# Altium PCB SDC_V3.0.PcbDoc (part 4 of 4)
Units mm, origin at the board's own origin, x right, y up, seen from the top; angles counter-clockwise.
Board outline 130 x 100 mm, 4 copper layers (Top Layer, Ground Plane, Power Plane, Bottom Layer), stack 1.466 mm thick; 369 components, 219 nets, 1234 pads, 1046 vias.
Unrouted connection lines stored in the file: 2.
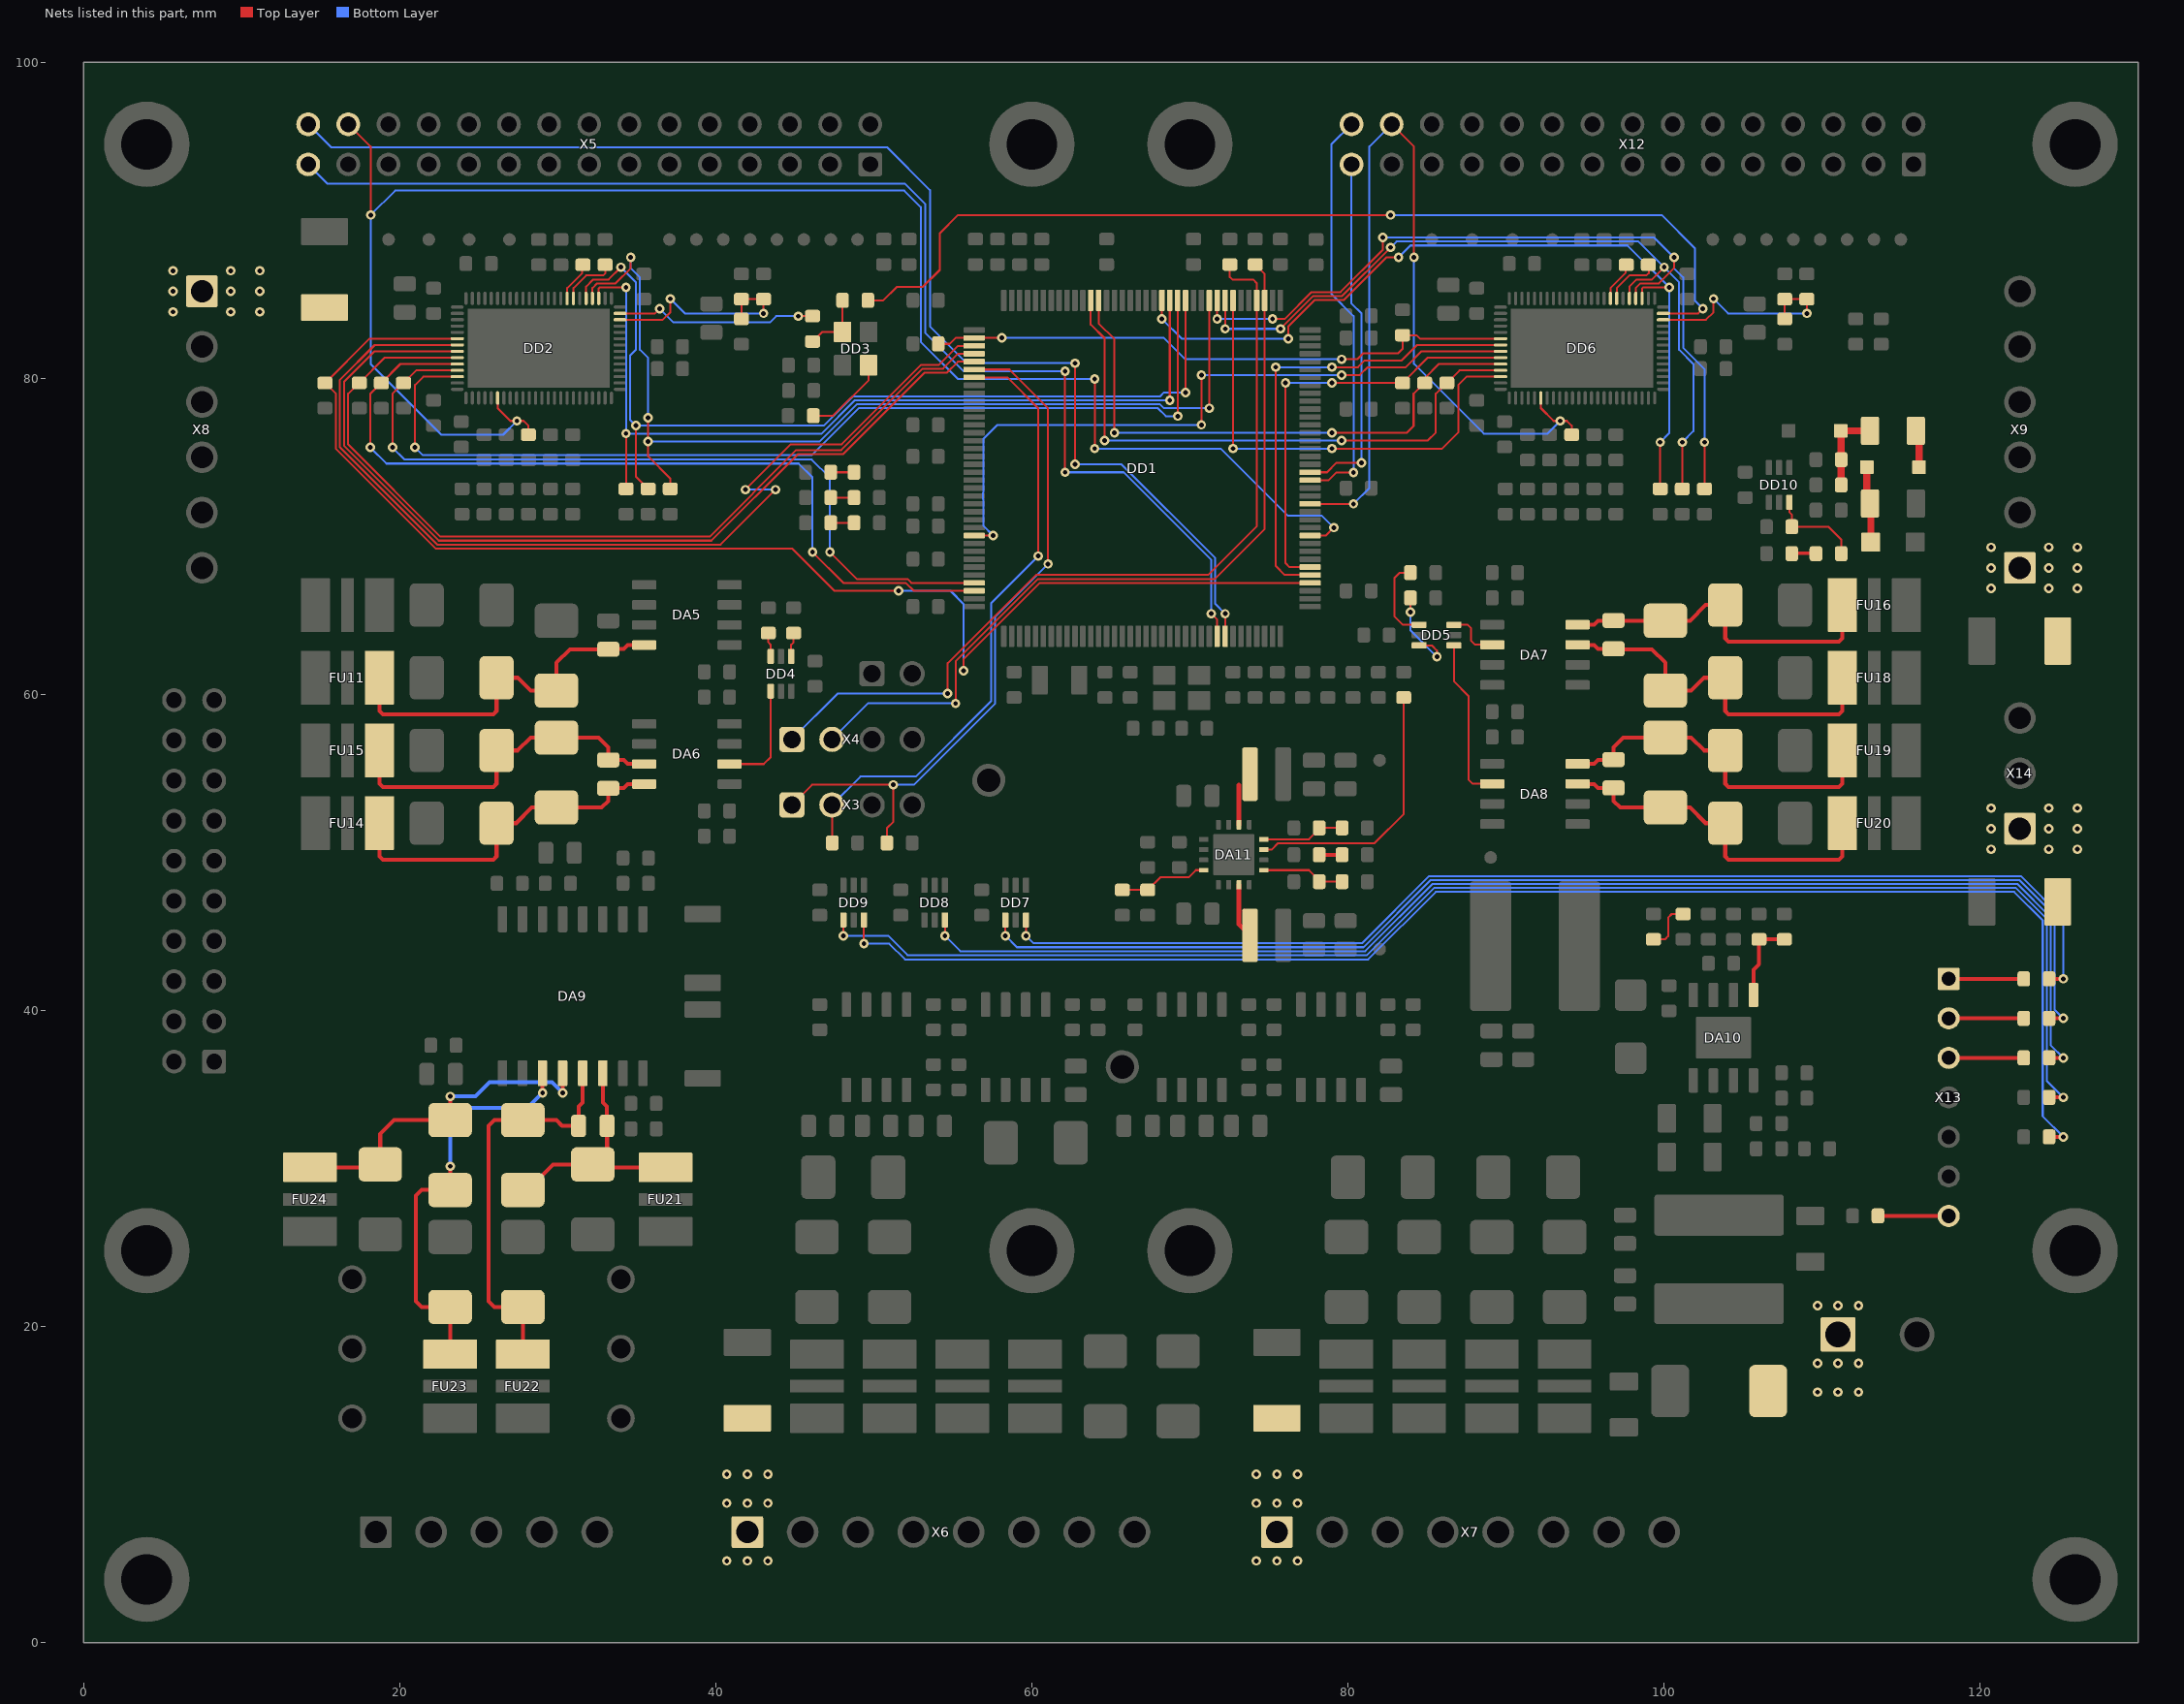
[diagram p5: the nets of this part, all layers, seen from the top]

## Via types
v1: diameter 0.6, hole 0.3, Top Layer to Bottom Layer, tented both sides, 989 vias
v2: diameter 0.6, hole 0.3, Top Layer to Bottom Layer, 57 vias

## Nets (pads, with @x,y where several pads share a name; then routed paths per layer and width w, separated by ;. In a path a pad name is that pad's centre, name@x,y a point inside that pad or via, vN(x,y) a via of type N, cw(c..) or ccw(c..) an arc to the next point about the centre after c; other vN are vias at no path point) (continued)
NetDA5_8: DA5.8 FU11.1 R51.1 VD13.1 VD14.1 | length 23.7
  Top Layer w0.25: FU11.1@18.725,61.05 18.725,58.952 18.935,58.742 25.935,58.742 26.135,58.942 VD13.1@26.135,61.05 27.475,61.05 28.285,60.24 VD14.1@29.925,60.24 29.925,62 30.775,62.85 R51.1@33.2,62.85 ; R51.1@33.215,62.87 34.19,62.87 34.44,63.12 DA5.8@35.475,63.12
NetDA6_2: DA6.2 DD4.1 | length 7
  Top Layer w0.125: DA6.2@40.875,55.59 43.04,55.59 43.475,56.025 DD4.1@43.475,60.2
NetDA6_7: DA6.7 FU15.1 R54.2 VD17.2 VD18.1 | length 22.6
  Top Layer w0.25: FU15.1@18.725,56.45 18.725,54.352 18.935,54.142 25.935,54.142 26.135,54.342 VD18.1@26.135,56.45 27.475,56.45 28.285,57.26 VD17.2@29.925,57.26 32.59,57.26 33.2,56.65 33.2,55.855 34.175,55.855 34.425,55.605 DA6.7@35.46,55.605
NetDA6_8: DA6.8 FU14.1 R54.1 VD16.1 VD17.1 | length 22.6
  Top Layer w0.25: FU14.1@18.725,51.85 18.725,49.752 18.935,49.542 25.935,49.542 26.135,49.742 VD16.1@26.135,51.85 27.375,51.85 28.365,52.84 VD17.1@29.925,52.84 32.785,52.84 33.2,53.255 R54.1@33.2,54.05 ; R54.1@33.215,54.07 34.19,54.07 34.44,54.32 DA6.8@35.475,54.32
NetDA7_2: DA7.2 DD5.3 | length 3.4
  Top Layer w0.125: DD5.3@86.7,64.4 87.575,64.4 87.775,64.2 87.775,63.4 88.04,63.135 DA7.2@89.125,63.135
NetDA7_7: DA7.7 FU18.1 R55.2 VD20.2 VD21.1 | length 23.7
  Top Layer w0.25: DA7.7@94.54,63.12 95.575,63.12 95.825,62.87 R55.2@96.8,62.87 ; R55.2@96.8,62.85 99.225,62.85 100.075,62 VD20.2@100.075,60.24 101.715,60.24 102.525,61.05 VD21.1@103.865,61.05 103.865,58.942 104.065,58.742 111.065,58.742 111.275,58.952 FU18.1@111.275,61.05
NetDA7_8: DA7.8 FU16.1 R55.1 VD19.1 VD20.1 | length 21.6
  Top Layer w0.25: DA7.8@94.525,64.405 95.56,64.405 95.81,64.655 R55.1@96.785,64.655 ; R55.1@96.8,64.65 96.81,64.66 VD20.1@100.075,64.66 101.635,64.66 102.625,65.65 VD19.1@103.865,65.65 103.865,63.542 104.065,63.342 111.065,63.342 111.275,63.552 FU16.1@111.275,65.65
NetDA8_2: DA8.2 DD5.1 | length 10.5
  Top Layer w0.125: DD5.1@86.7,63.1 86.7,60.825 87.625,59.9 87.625,54.6 87.89,54.335 DA8.2@89.125,54.335
NetDA8_7: DA8.7 FU20.1 R58.2 VD23.2 VD24.1 | length 22.9
  Top Layer w0.25: DA8.7@94.54,54.32 95.575,54.32 95.825,54.07 R58.2@96.8,54.07 ; 95.56,54.32 95.81,54.07 ; R58.2@96.8,54.05 96.8,53.255 97.215,52.84 VD23.2@100.075,52.84 101.635,52.84 102.625,51.85 VD24.1@103.865,51.85 103.865,49.742 104.065,49.542 111.065,49.542 111.275,49.752 FU20.1@111.275,51.85
NetDA8_8: DA8.8 FU19.1 R58.1 VD22.1 VD23.1 | length 22.6
  Top Layer w0.25: DA8.8@94.525,55.605 95.56,55.605 95.81,55.855 R58.1@96.785,55.855 ; R58.1@96.8,55.855 96.8,56.65 97.41,57.26 VD23.1@100.075,57.26 101.715,57.26 102.525,56.45 VD22.1@103.865,56.45 103.865,54.342 104.065,54.142 111.065,54.142 111.275,54.352 FU19.1@111.275,56.45
NetDA9_11: DA9.11 FU23.1 VD28.1 VD29.1 | length 26.6
  Top Layer w0.25: FU23.1@23.2,18.25 VD28.1@23.2,21.24 21.385,21.24 21.025,21.6 21.025,28.28 21.385,28.64 VD29.1@23.2,28.64 v1(23.2,30.14) ; v1(29.045,34.78) DA9.11@29.045,36.025
  Bottom Layer w0.25: v1(23.2,30.14) 23.2,33.1 23.925,33.825 28.09,33.825 v1(29.045,34.78)
NetDA9_12: DA9.12 FU24.1 VD29.2 VD30.1 | length 21.8
  Top Layer w0.25: FU24.1@14.325,30.075 18.775,30.075 18.775,32.175 19.66,33.06 VD29.2@23.2,33.06 v1(23.2,34.56) ; v1(30.315,34.78) DA9.12@30.315,36.025
  Bottom Layer w0.25: v1(23.2,34.56) 24.81,34.56 25.7,35.45 29.645,35.45 v1(30.315,34.78)
NetDA9_13: DA9.13 FU22.1 R59.2 VD26.2 VD27.1 | length 25.8
  Top Layer w0.25: FU22.1@27.8,18.25 VD27.1@27.8,21.24 25.985,21.24 25.625,21.6 25.625,32.7 25.985,33.06 VD26.2@27.8,33.06 29.915,33.06 30.275,32.7 R59.2@31.325,32.7 31.325,33.925 31.585,34.185 DA9.13@31.585,36.025
NetDA9_14: DA9.14 FU21.1 R59.1 VD25.1 VD26.1 | length 16
  Top Layer w0.25: VD26.1@27.8,28.64 28.09,28.64 29.71,30.26 VD25.1@32.225,30.26 ; DA9.14@32.855,36.025 32.855,34.185 33.115,33.925 R59.1@33.115,32.7 ; R59.1@33.125,32.7 33.125,31.16 VD25.1@32.225,30.26 ; FU21.1@36.825,30.075 32.41,30.075 VD25.1@32.225,30.26
NetDA10_5: DA10.5 R66.2 R69.1 | length 5.3
  Top Layer w0.25: DA10.5@105.655,40.975 105.655,42.58 106,42.925 R69.1@106,44.5 R66.2@107.6,44.5
NetDA11_3: DA11.3 L6.1 | length 5.2
  Top Layer w0.3: DA11.3@73.1,47.95 73.1,45.45 L6.1@73.8,44.75 73.8,45.95 L6.1@73.45,46.3
NetDA11_5: DA11.5 R73.2 R75.1 | length 5.3
  Top Layer w0.125: DA11.5@74.675,48.875 77.525,48.875 78.175,48.225 R75.1@78.175,48.15 R73.2@79.625,48.15
NetDA11_8: DA11.8 R76.2 R77.1 | length 5.3
  Top Layer w0.125: DA11.8@74.675,50.825 77.525,50.825 78.175,51.475 R77.1@78.175,51.55 R76.2@79.625,51.55
NetDA11_10: DA11.10 L7.1 | length 2.5
  Top Layer w0.3: DA11.10@73.1,51.75 73.1,54.25
NetDA11_16: DA11.16 R71.1 R74.1 | length 5.7
  Top Layer w0.125: R74.1@65.725,47.625 R71.1@67.325,47.625 68.125,48.425 69.925,48.425 70.375,48.875 DA11.16@70.875,48.875
NetDD2_59: DD2.59 R17.1 | length 3.6
  Top Layer w0.125: DD2.59@31,85.05 31,85.7 31.8,86.5 32.875,86.5 33.025,86.65 33.025,87.15 R17.1@33,87.175
NetDD2_60: DD2.60 R18.1 | length 2.5
  Top Layer w0.125: DD2.60@30.6,85.05 30.6,85.7 31.561,86.661 31.561,87.136 R18.1@31.6,87.175
NetDD3_1: DD3.1 R19.2 | length 5.4
  Top Layer w0.125: R19.2@46.175,77.625 47.425,77.625 49.675,79.875 DD3.1@49.675,80.825
NetDD3_3: DD3.3 R20.2 R21.2 | length 4.1
  Top Layer w0.125: R21.2@46.125,82.325 46.15,82.325 46.75,82.925 DD3.3@48.025,82.925 R20.2@48.025,84.925
NetDD4_4: DD4.4 R53.1 | length 1.5
  Top Layer w0.125: DD4.4@44.775,62.4 44.775,63.142 44.925,63.292 R53.1@44.925,63.875
NetDD4_6: DD4.6 R52.1 | length 1.5
  Top Layer w0.125: R52.1@43.325,63.875 43.325,63.292 43.475,63.142 DD4.6@43.475,62.4
NetDD5_4: DD5.4 R57.1 | length 5.4
  Top Layer w0.125: R57.1@83.95,67.7 83.275,67.7 82.925,67.35 82.925,64.95 83.475,64.4 DD5.4@84.5,64.4
NetDD5_6: DD5.6 R56.1 | length 6.1
  Top Layer w0.125: v1(83.95,65.2) R56.1@83.95,66.1 ; DD5.6@84.5,63.1 85.3,63.1 85.625,62.775 v1(85.625,62.375)
  Bottom Layer w0.125: v1(83.95,65.2) 83.95,64.05 v1(85.625,62.375)
NetDD6_59: DD6.59 R78.1 | length 3.6
  Top Layer w0.125: DD6.59@97,85.05 97,85.7 97.8,86.5 98.875,86.5 99.025,86.65 99.025,87.15 R78.1@99,87.175
NetDD6_60: DD6.60 R79.1 | length 2.5
  Top Layer w0.125: DD6.60@96.6,85.05 96.6,85.7 97.561,86.661 97.561,87.136 R79.1@97.6,87.175
NetDD7_4: DD7.4 R96.1 | length 78
  Top Layer w0.125: v1(58.325,44.725) DD7.4@58.325,45.725
  Top Layer w0.25: R96.1@124.35,39.5 v1(125.25,39.5)
  Bottom Layer w0.125: v1(58.325,44.725) 59.05,44 80.989,44 85.239,48.25 85.25,48.25 122.275,48.25 122.461,48.25 124.7,46.011 124.7,40.05 v1(125.25,39.5)
NetDD7_6: DD7.6 R95.1 | length 74.4
  Top Layer w0.125: v1(59.625,44.725) DD7.6@59.625,45.725
  Top Layer w0.25: R95.1@124.35,42 v1(125.25,42)
  Bottom Layer w0.125: v1(59.625,44.725) 60.1,44.25 68.325,44.25 80.886,44.25 85.136,48.5 85.225,48.5 122.025,48.5 122.564,48.5 125.25,45.814 125.25,45.275 v1(125.25,42)
NetDD8_6: DD8.6 R97.1 | length 84.1
  Top Layer w0.125: v1(54.5,44.725) DD8.6@54.5,45.725
  Top Layer w0.25: R97.1@124.35,37 v1(125.25,37)
  Bottom Layer w0.125: v1(54.5,44.725) 55.475,43.75 81.093,43.75 85.343,48 85.35,48 122.125,48 122.357,48 124.45,45.907 124.45,37.8 v1(125.25,37)
NetDD9_4: DD9.4 R99.1 | length 92.8
  Top Layer w0.125: v1(48.075,44.725) DD9.4@48.075,45.725
  Top Layer w0.25: R99.1@124.35,34.5 v1(125.25,34.5)
  Bottom Layer w0.125: v1(48.075,44.725) 50.9,44.725 52.125,43.5 81.196,43.5 85.321,47.625 85.446,47.75 121.925,47.75 122.254,47.75 124.2,45.804 124.2,35.55 v1(125.25,34.5)
NetDD9_6: DD9.6 R98.1 | length 94.1
  Top Layer w0.125: v1(49.375,44.225) DD9.6@49.375,45.725
  Top Layer w0.25: R98.1@124.35,32 v1(125.25,32)
  Bottom Layer w0.125: v1(49.375,44.225) 50.975,44.225 51.975,43.225 70.525,43.225 81.275,43.225 85.55,47.5 122.15,47.5 123.95,45.7 123.95,33.3 v1(125.25,32)
NetDD10_6: DD10.6 R101.2 R104.2 | length 6
  Top Layer w0.125: DD10.6@107.925,72.15 107.925,71.525 108.075,71.375 R104.2@108.075,70.6 110.4,70.6 111.2,69.8 R101.2@111.2,68.9
NetFU2_2: FU2.2 X6.1
  other v1: 40.7,5.175 42,5.175 43.3,5.175 40.7,8.825 42,8.825 43.3,8.825 40.7,10.65 42,10.65 43.3,10.65
NetFU4_2: FU4.2 X7.1
  other v1: 74.2,5.175 75.5,5.175 76.8,5.175 74.2,8.825 75.5,8.825 76.8,8.825 74.2,10.65 75.5,10.65 76.8,10.65
NetFU12_2: FU12.2 X8.1
  other v1: 5.675,84.2 9.325,84.2 11.15,84.2 5.675,85.5 9.325,85.5 11.15,85.5 5.675,86.8 9.325,86.8 11.15,86.8
NetFU17_2: FU17.2 X9.1
  other v1: 120.675,66.7 124.325,66.7 126.15,66.7 120.675,68 124.325,68 126.15,68 120.675,69.3 124.325,69.3 126.15,69.3
NetFU25_1: FU25.1 X14.1
  other v1: 120.675,50.2 124.325,50.2 126.15,50.2 120.675,51.5 124.325,51.5 126.15,51.5 120.675,52.8 124.325,52.8 126.15,52.8
NetHL1_2: HL1.2 R2.2 | length 1.5
  Top Layer w0.125: R2.2@47.275,74.05 HL1.2@48.75,74.05
NetHL2_2: HL2.2 R3.2 | length 1.5
  Top Layer w0.125: R3.2@47.275,72.45 HL2.2@48.75,72.45
NetHL3_2: HL3.2 R6.2 | length 1.5
  Top Layer w0.125: R6.2@47.275,70.85 HL3.2@48.75,70.85
NetHL4_1: HL4.1 R63.2 | length 3.2
  Top Layer w0.125: HL4.1@99.325,44.5 100.05,44.5 100.25,44.7 100.25,45.875 100.475,46.1 R63.2@101.2,46.1
NetHL5_1: HL5.1 R67.2 | length 1.4
  Top Layer w0.25: R67.2@78.175,49.85 HL5.1@79.625,49.85
NetHL6_2: HL6.2 R101.1 | length 1.5
  Top Layer w0.25: HL6.2@108.075,68.9 R101.1@109.6,68.95
NetR102_1: R102.1 R103.2 R106.1 VD35.1 | length 5.3
  Top Layer w0.45: R103.2@111.2,73.25 R106.1@111.2,74.85 111.2,76.65 VD35.1@111.175,76.675 R102.1@113.025,76.675
NetR102_2: R102.2 VD34.2 | length 2.4
  Top Layer w0.45: R102.2@115.925,76.675 116.125,76.475 VD34.2@116.125,74.375
NetR105_1: R105.1 VD33.1 VD34.1 | length 4.9
  Top Layer w0.45: VD34.1@112.825,74.375 112.825,72.275 R105.1@113.025,72.075 113.075,72.025 VD33.1@113.075,69.625
NetVD31_2: VD31.2 X11.1
  other v1: 109.7,15.85 111,15.85 112.3,15.85 109.7,17.675 111,17.675 112.3,17.675 109.7,21.325 111,21.325 112.3,21.325
PGD_3.3V: DA11.7 R70.1 | length 17.2
  Top Layer w0.125: DA11.7@74.675,50.175 75.175,50.175 75.575,50.575 81.675,50.575 83.525,52.425 83.525,58.525 R70.1@83.525,59.8
PWR_24V_LED_A: R100.1 X13.7 | length 4.5
  Top Layer w0.25: R100.1@113.525,27 X13.7@118,27
STAT_LED1_A: R95.2 X13.1 | length 4.7
  Top Layer w0.25: X13.1@118,42 R95.2@122.75,42
STAT_LED2_A: R96.2 X13.2 | length 4.7
  Top Layer w0.25: X13.2@118,39.5 R96.2@122.75,39.5
STAT_LED3_A: R97.2 X13.3 | length 4.7
  Top Layer w0.25: X13.3@118,37 R97.2@122.75,37
T_SENSE_A_1: DD1.28 X5.29 | length 81
  Top Layer w0.125: v1(62.1,74.05) v1(62.1,80.45) ; v1(71.35,65.1) 71.725,64.725 DD1.28@71.725,63.675
  Bottom Layer w0.125: X5.29@14.22,93.53 15.45,92.3 51.975,92.3 53.25,91.025 53.25,82.875 55.675,80.45 v1(62.1,80.45) ; v1(62.1,74.05) 65.8,74.05 71.35,68.5 v1(71.35,65.1)
T_SENSE_A_2: DD1.29 X5.30 | length 82.8
  Top Layer w0.125: v1(62.725,74.55) v1(62.725,80.95) ; DD1.29@72.225,63.675 v1(72.225,65.1)
  Bottom Layer w0.125: X5.30@14.22,96.07 15.68,94.61 45.315,94.61 50.84,94.61 53.55,91.9 53.55,83.275 55.875,80.95 v1(62.725,80.95) ; v1(62.725,74.55) 65.675,74.55 71.6,68.625 71.6,65.725 v1(72.225,65.1)
T_SENSE_B_1: DD1.54 X12.29 | length 22.6
  Top Layer w0.125: DD1.54@77.6,74.05 78.675,74.05 79.275,74.65 v1(80.85,74.65)
  Bottom Layer w0.125: X12.29@80.22,93.53 80.22,84.73 80.85,84.1 v1(80.85,74.65)
T_SENSE_B_2: DD1.53 X12.30 | length 26.1
  Top Layer w0.125: DD1.53@77.6,73.55 78.775,73.55 79.25,74.025 v1(80.35,74.025)
  Bottom Layer w0.125: X12.30@80.22,96.07 78.95,94.8 78.95,85.325 80.35,83.925 v1(80.35,74.025)
TLMTR_RX: DD1.114 R5.2 X3.1 | length 45.1
  Top Layer w0.125: X3.1@44.815,53 46.09,54.275 v1(51.24,54.275) 51.24,51.94 50.825,51.525 R5.2@50.825,50.6 ; DD1.114@56.35,80.55 58.575,80.55 61.025,78.1 61.025,72.175 v1(61.025,68.25)
  Bottom Layer w0.125: v1(51.24,54.275) 52.525,54.275 57.675,59.425 57.675,64.9 v1(61.025,68.25)
TLMTR_TX: DD1.115 R8.2 X3.2 | length 39.8
  Top Layer w0.125: X3.2@47.355,53 47.355,50.62 R8.2@47.375,50.6 ; DD1.115@56.35,80.05 58.45,80.05 60.4,78.1 v1(60.4,68.75)
  Bottom Layer w0.125: X3.2@47.355,53 49.155,54.8 52.65,54.8 57.425,59.575 57.425,65.775 v1(60.4,68.75)
TMC_A_CLK: DD2.51 R21.1 | length 12.8
  Top Layer w0.125: DD2.51@33.95,84.1 36.15,84.1 v1(36.45,84.4) ; v1(45.225,83.925) R21.1@46.125,83.925
  Bottom Layer w0.125: v1(36.45,84.4) 36.55,84.3 37.325,83.525 43.425,83.525 43.825,83.925 v1(45.225,83.925)
TMC_A_CS: DD1.40 DD2.6 R24.1 | length 86.6
  Top Layer w0.125: DD2.6@23.65,82.5 18.097,82.5 15.297,79.7 15.975,79.022 15.975,75.525 22.275,69.225 44.825,69.225 47.5,66.55 v1(51.575,66.55) ; v1(55.675,61.5) 55.675,62.225 58.475,65.025 60.5,67.05 DD1.40@77.6,67.05
  Bottom Layer w0.125: v1(51.575,66.55) 54.85,66.55 55.675,65.725 v1(55.675,61.5)
TMC_A_DIR: DD1.82 DD2.56 R33.1 | length 63.4
  Top Layer w0.125: DD2.56@32.2,85.05 32.2,85.7 32.5,86 33.664,86 34.625,86.961 v1(34.625,87.65) ; v1(35.725,77.5) v1(35.725,76) 35.725,75.05 37.125,73.65 R33.1@37.125,73 ; v1(71.225,78.1) DD1.82@71.225,84.925
  Bottom Layer w0.125: v1(34.625,87.65) 34.625,86.95 35.2,86.375 35.2,81.8 35.725,81.275 v1(35.725,77.5) ; v1(35.725,76) 46.575,76 48.925,78.35 68.1,78.35 68.35,78.1 v1(71.225,78.1)
TMC_A_EN: DD1.87 DD2.55 R30.1 | length 56.7
  Top Layer w0.125: DD2.55@32.6,85.05 32.6,85.675 32.675,85.75 v1(34.325,85.75) ; R30.1@34.325,73 v1(34.325,76.5) ; v1(68.725,78.6) DD1.87@68.725,84.925
  Bottom Layer w0.125: v1(34.325,85.75) v1(34.325,76.5) 36.4,76.5 46.7,76.5 48.8,78.6 v1(68.725,78.6)
TMC_A_MISO: DD1.112 DD2.9 R26.1 | length 57.8
  Top Layer w0.125: R26.1@17.428,79.7 16.75,79.022 16.75,75.811 22.586,69.975 39.614,69.975 45.089,75.45 47.946,75.45 53.096,80.6 54.375,80.6 55.325,81.55 DD1.112@56.35,81.55 ; R26.1@17.45,79.7 19.05,81.3 DD2.9@23.65,81.3
TMC_A_MOSI: DD1.113 DD2.8 | length 59
  Top Layer w0.125: DD2.8@23.65,81.7 18.4,81.7 16.5,79.8 16.5,75.707 22.482,69.725 39.725,69.725 45.2,75.2 48.05,75.2 53.2,80.35 54.625,80.35 55.325,81.05 DD1.113@56.35,81.05
TMC_A_nRST: C43.2 DD2.50 R35.1 R36.1 | length 14.3
  Top Layer w0.125: DD2.50@33.95,83.7 36.65,83.7 37.125,84.175 v1(37.125,85.025) ; R36.1@41.625,83.75 C43.2@41.625,85 R35.1@43.025,85 v1(43.025,84.1)
  Bottom Layer w0.125: v1(37.125,85.025) 38.05,84.1 v1@43.225,84.1
TMC_A_RX: DD1.141 DD2.11 R29.1 | length 51.2
  Top Layer w0.125: v1(19.55,75.625) 19.55,79.022 20.228,79.7 R29.1@20.25,79.7 21.05,80.5 DD2.11@23.65,80.5 ; v1(47.225,69) 48.925,67.3 52.129,67.3 52.379,67.05 DD1.141@56.35,67.05
  Bottom Layer w0.125: v1(19.55,75.625) 20.325,74.85 46.075,74.85 47.225,73.7 v1(47.225,69)
TMC_A_SCK: DD1.111 DD2.7 | length 64.3
  Top Layer w0.125: DD2.7@23.65,82.1 18.425,82.1 16.225,79.9 16.225,79.126 16.225,75.629 22.379,69.475 40.3,69.475 v1(43.775,72.95) ; v1(41.875,72.95) 44.75,75.825 47.968,75.825 52.993,80.85 54.125,80.85 55.325,82.05 DD1.111@56.35,82.05
  Bottom Layer w0.125: v1(41.875,72.95) v1(43.775,72.95)
TMC_A_STAT: DD1.86 DD2.12 | length 64.1
  Top Layer w0.125: v1(20.975,75.625) 20.975,79.575 21.5,80.1 DD2.12@23.65,80.1 ; v1(69.225,77.6) DD1.86@69.225,84.925
  Bottom Layer w0.125: v1(20.975,75.625) 21.475,75.125 46.075,75.125 49.05,78.1 67.975,78.1 68.475,77.6 v1(69.225,77.6)
TMC_A_STEP: DD1.85 DD2.57 R32.1 | length 60.1
  Top Layer w0.125: DD2.57@31.8,85.05 31.8,85.8 32.25,86.25 33.225,86.25 v1(34,87.025) ; v1(34.95,77) 34.95,73.775 R32.1@35.725,73 ; v1@69.725,78.975 DD1.85@69.725,84.925
  Bottom Layer w0.125: v1(34,87.025) 34.95,86.075 34.95,81.8 34.575,81.425 34.575,77.375 v1(34.95,77) 36.525,77 46.825,77 48.675,78.85 68.1,78.85 68.35,79.1 v1(69.725,79.1)
TMC_A_TX: DD1.142 DD2.10 R28.1 | length 54.4
  Top Layer w0.125: v1(18.15,75.625) 18.15,79.022 R28.1@18.828,79.7 ; R28.1@18.85,79.7 20.05,80.9 DD2.10@23.65,80.9 ; v1(46.125,69) 48.075,67.05 52.025,67.05 52.525,66.55 DD1.142@56.35,66.55
  Bottom Layer w0.125: v1(18.15,75.625) 19.175,74.6 45.25,74.6 46.125,73.725 v1(46.125,69)
TMC_B_CLK: DD6.51 R20.1 | length 63.4
  Top Layer w0.125: R20.1@49.625,84.925 50.6,84.925 51.45,85.775 53.1,85.775 54.175,86.85 54.175,89.175 55.325,90.325 v1(82.7,90.325) ; DD6.51@99.95,84.1 102.15,84.1 v1(102.45,84.4)
  Bottom Layer w0.125: v1(82.7,90.325) 99.85,90.325 101.95,88.225 101.95,84.9 v1(102.45,84.4)
TMC_B_CS: DD1.110 DD6.6 R14.2 R82.1 | length 37.6
  Top Layer w0.125: R14.2@54.075,82.175 54.8,82.175 55.175,82.55 DD1.110@56.35,82.55 ; DD1.110@56.325,82.525 DD1.110@56.35,82.55 ; v1(58.1,82.55) DD1.110@56.35,82.55 ; v1(79.6,81.2) 80.575,81.2 80.95,81.575 83.175,81.575 83.45,81.85 R82.1@83.45,82.725 84.325,82.725 84.55,82.5 DD6.6@89.65,82.5
  Bottom Layer w0.125: v1(58.1,82.55) 68.35,82.55 69.7,81.2 v1(79.6,81.2)
TMC_B_DIR: DD1.81 DD6.56 R91.1 | length 52.9
  Top Layer w0.125: v1(71.725,83.75) DD1.81@71.725,84.925 ; v1(75.225,83.75) 75.996,83.75 77.696,85.45 79.521,85.45 82.2,88.129 v1(82.2,88.9) ; DD6.56@98.2,85.05 98.2,85.7 98.5,86 99.664,86 100.625,86.961 v1(100.625,87.65) ; R91.1@102.55,73 v1(102.55,75.95)
  Bottom Layer w0.125: v1(71.725,83.75) v1(75.225,83.75) ; v1(82.2,88.9) 99.375,88.9 v1(100.625,87.65) 100.625,86.95 101.2,86.375 101.2,81.925 102.55,80.575 v1(102.55,75.95)
TMC_B_EN: DD1.88 DD6.55 R88.1 | length 53.2
  Top Layer w0.125: v1(68.225,83.75) DD1.88@68.225,84.925 ; v1(76.225,82.5) 76.225,83.271 77.904,84.95 79.729,84.95 82.429,87.65 v1(83.2,87.65) ; DD6.55@98.6,85.05 98.6,85.675 98.675,85.75 v1(100.325,85.75) ; R88.1@99.75,73 v1(99.75,75.95)
  Bottom Layer w0.125: v1(68.225,83.75) 69.475,82.5 v1(76.225,82.5) ; v1(83.2,87.65) 83.95,88.4 93.336,88.4 97.675,88.4 v1(100.325,85.75) 100.325,76.525 v1(99.75,75.95)
TMC_B_MISO: DD1.42 DD6.9 R84.1 | length 27.3
  Top Layer w0.125: v1(76.05,79.7) 76.05,68.3 76.3,68.05 DD1.42@77.6,68.05 ; v1(78.975,79.7) R84.1@83.425,79.7 ; R84.1@83.45,79.7 85.05,81.3 DD6.9@89.65,81.3
  Bottom Layer w0.125: v1(76.05,79.7) v1(78.975,79.7)
TMC_B_MOSI: DD1.135 DD6.8 | length 44.4
  Top Layer w0.125: DD1.135@56.35,70.05 v1(57.55,70.05) ; v1(70.725,77.05) v1(70.725,80.2) ; v1(79.6,80.2) 80.75,80.2 81.25,80.7 83.65,80.7 84.65,81.7 DD6.8@89.65,81.7
  Bottom Layer w0.125: v1(57.55,70.05) 56.925,70.675 56.925,72.336 56.912,72.348 56.912,72.752 56.925,72.764 56.925,76.15 57.825,77.05 v1(70.725,77.05) ; v1(70.725,80.2) v1(79.6,80.2)
TMC_B_nRST: C108.2 DD6.50 R93.1 R94.1 | length 14.3
  Top Layer w0.125: DD6.50@99.95,83.7 102.65,83.7 103.125,84.175 v1(103.125,85.025) ; R94.1@107.625,83.75 C108.2@107.625,85 R93.1@109.025,85 v1(109.025,84.1)
  Bottom Layer w0.125: v1(103.125,85.025) 104.05,84.1 v1@109.225,84.1
TMC_B_RX: DD1.97 DD6.11 R87.1 | length 37.5
  Top Layer w0.125: DD1.97@63.725,84.925 63.725,83.4 64.6,82.525 v1(64.6,76.05) ; v1(79.6,76.05) 85.025,76.05 85.55,76.575 85.55,79.022 R87.1@86.228,79.7 ; R87.1@86.25,79.7 87.05,80.5 DD6.11@89.65,80.5
  Bottom Layer w0.125: v1(64.6,76.05) v1(79.6,76.05)
TMC_B_SCK: DD1.41 DD6.7 | length 29.8
  Top Layer w0.125: v1(75.425,80.7) 75.425,77.875 75.425,68.125 76,67.55 DD1.41@77.6,67.55 ; v1(78.975,80.7) 80.625,80.7 81.05,81.125 83.4,81.125 84.375,82.1 DD6.7@89.65,82.1
  Bottom Layer w0.125: v1(75.425,80.7) v1(78.975,80.7)
TMC_B_STAT: DD1.79 DD6.12 | length 29.9
  Top Layer w0.125: v1(72.725,75.55) DD1.79@72.725,84.925 ; v1(78.975,75.55) 85.95,75.55 86.975,76.575 86.975,79.575 87.5,80.1 DD6.12@89.65,80.1
  Bottom Layer w0.125: v1(72.725,75.55) v1(78.975,75.55)
TMC_B_STEP: DD1.80 DD6.57 R90.1 | length 51.1
  Top Layer w0.125: v1(72.225,83.125) DD1.80@72.225,84.925 ; v1(75.725,83.125) 77.8,85.2 79.625,85.2 v1(82.7,88.275) ; DD6.57@97.8,85.05 97.8,85.8 98.25,86.25 99.225,86.25 v1(100,87.025) ; R90.1@101.15,73 v1(101.15,75.95)
  Bottom Layer w0.125: v1(72.225,83.125) v1(75.725,83.125) ; v1(82.7,88.275) 83.075,88.65 93.439,88.65 98.375,88.65 v1(100,87.025) 100.95,86.075 100.95,81.8 101.85,80.9 101.85,76.65 v1(101.15,75.95)
TMC_B_TX: DD1.96 DD6.10 R86.1 | length 36.4
  Top Layer w0.125: DD1.96@64.225,84.925 64.225,83.475 65.225,82.475 v1(65.225,76.55) ; v1(78.975,76.55) 83.725,76.55 84.15,76.975 84.15,79.022 R86.1@84.828,79.7 ; R86.1@84.85,79.7 84.85,80 85.75,80.9 DD6.10@89.65,80.9
  Bottom Layer w0.125: v1(65.225,76.55) v1(78.975,76.55)
USART1_RX: DD1.76 R12.2 X4.1 | length 54.2
  Top Layer w0.125: v1(54.675,60.05) 54.675,61.968 60.254,67.546 60.261,67.546 60.264,67.55 71.15,67.55 74.225,70.625 DD1.76@74.225,84.925 74.225,86.025 74.025,86.225 72.7,86.225 72.525,86.4 R12.2@72.525,87.2
  Bottom Layer w0.125: X4.1@44.815,57.15 47.715,60.05 v1(54.675,60.05)
USART1_TX: DD1.75 R10.2 X4.2 | length 51.4
  Top Layer w0.125: v1(55.175,59.425) 55.175,62.1 60.375,67.3 71.575,67.3 74.725,70.45 DD1.75@74.725,84.925 74.725,86.6 R10.2@74.125,87.2
  Bottom Layer w0.125: X4.2@47.355,57.15 49.63,59.425 v1(55.175,59.425)
VM_A_DIV: C25.2 DD1.46 DD2.20 X5.28 | length 110.5
  Top Layer w0.125: X5.28@16.76,96.07 18.175,94.655 v1(18.175,90.325) ; DD2.20@26.2,78.75 26.2,78.111 27.011,77.3 v1(27.425,77.3) 27.85,77.3 28.15,77 C25.2@28.15,76.425 ; v1(63.975,75.55) v1(63.975,79.95) ; DD1.46@77.6,70.05 78.6,70.05 v1(79.1,70.55)
  Bottom Layer w0.125: v1(27.425,77.3) 26.55,76.425 22.65,76.425 18.175,80.9 v1(18.175,90.325) 19.725,91.875 51.925,91.875 52.975,90.825 52.975,82.3 55.325,79.95 v1(63.975,79.95) ; v1(63.975,75.55) 71.95,75.55 76.2,71.3 78.35,71.3 v1(79.1,70.55)
VM_B_DIV: C91.2 DD1.50 DD6.20 X12.28 | length 58.4
  Top Layer w0.125: DD1.50@77.6,72.05 v1(80.35,72.05) ; X12.28@82.76,96.07 84.175,94.655 v1(84.175,87.65) ; DD6.20@92.2,78.65 92.2,78.111 93.011,77.3 v1(93.425,77.3) 93.85,77.3 94.15,77 C91.2@94.15,76.425
  Bottom Layer w0.125: v1(80.35,72.05) 81.35,73.05 81.35,94.66 X12.28@82.76,96.07 ; v1(84.175,87.65) 84.175,80.911 88.586,76.5 92.625,76.5 v1(93.425,77.3)
pads on no net: DA1.1 DA2.5 DA2.6 DA3.1 DA4.5 DA4.6 DA5.5 DA5.6 DA6.5 DA6.6 DA7.5 DA7.6 DA8.5 DA8.6 DA11.6 DD1.1 DD1.7 DD1.10 DD1.11 DD1.12 DD1.13 DD1.14 DD1.15 DD1.18 DD1.19 DD1.22 DD1.26 DD1.27 DD1.34 DD1.35 DD1.36 DD1.37 DD1.43 DD1.44 DD1.45 DD1.55 DD1.56 DD1.57 DD1.58 DD1.59 DD1.60 DD1.63 DD1.64 DD1.65 DD1.66 DD1.67 DD1.68 DD1.69 DD1.74 DD1.77 DD1.78 DD1.89 DD1.90 DD1.91 DD1.92 DD1.93 DD1.98 DD1.99 DD1.100 DD1.101 DD1.102 DD1.103 DD1.104 DD1.116 DD1.117 DD1.118 DD1.124 DD1.125 DD1.126 DD1.128 DD1.136 DD1.137 DD1.139 DD1.140 DD2.1 DD2.4 DD2.5 DD2.21 DD2.22 DD2.25 DD2.26 DD2.27 DD2.28 DD2.29 DD2.30 DD2.33 DD2.36 DD2.37 DD2.38 DD2.58 DD2.64 DD2.65 DD2.66 DD2.67 DD2.68 DD2.69 DD2.70 DD2.71 DD2.74 DD2.75 DD2.76 DD6.1 DD6.4 DD6.5 DD6.21 DD6.22 DD6.25 DD6.26 DD6.27 DD6.28 DD6.29 DD6.30 DD6.33 DD6.36 DD6.37 DD6.38 DD6.58 DD6.64 DD6.65 DD6.66 DD6.67 DD6.68 DD6.69 DD6.70 DD6.71 DD6.74 DD6.75 DD6.76 DD8.4 DD10.4 FU1.2 FU3.2 FU5.2 FU6.2 FU7.2 FU8.2 FU9.2 FU10.2 FU11.2 FU13.2 FU14.2 FU15.2 FU16.2 FU18.2 FU19.2 FU20.2 FU21.2 FU22.2 FU23.2 FU24.2 X1.11 X1.17 X1.19 X6.7 X7.7

## Polygon pours and split planes (outlines as drawn)
GND on Top Layer "GND_L01_P137" (solid, remove dead copper, pour order 137): 96.375,9.125 96.625,8.875 120.225,8.875 120.475,9.125 120.475,24.85 120.225,25.1 108.375,25.1 108.125,24.85 108.125,23.65 108.675,23.1 109,22.775 113.85,22.775 114.1,22.525 114.1,12.975 113.85,12.725 98.775,12.725 98.525,12.975 98.525,14.375 98.275,14.625 96.625,14.625 96.375,14.375
NetVD31_2 on Top Layer "NETVD31_2_L01_P136" (solid, remove dead copper, pour order 136): 103.95,13.75 104.2,13.5 112.65,13.5 112.9,13.75 112.9,21.625 112.65,21.875 109.35,21.875 109.1,21.625 109.1,18.875 108.85,18.625 104.2,18.625 103.95,18.375
NetC72_2 on Top Layer "NETC72_2_L01_P134" (solid, remove dead copper, pour order 134): 96.375,15.775 96.375,21.9 96.6,22.125 98.625,22.125 98.875,22.375 98.875,23.125 99.125,23.375 107.825,23.375 108.075,23.125 108.075,19.775 107.825,19.525 103.275,19.525 103,19.25 103,13.75 102.75,13.5 99.2,13.5 98.95,13.75 98.95,15.275 98.7,15.525 96.625,15.525
+24V on Top Layer "+24V_L01_P133" (solid, remove dead copper, pour order 133): 98.625,26.375 98.875,26.125 98.875,25.375 99.125,25.125 107.825,25.125 108.075,25.375 108.075,25.75 108.325,26 110.75,26 111,26.25 111,29.75 110.75,30 105.225,30 104.975,30.25 104.975,33.475 104.15,34.3 102.15,34.3 101.9,34.05 101.9,29.25 101.65,29 96.625,29 96.375,28.75 96.375,26.6 96.6,26.375
NetFU12_2 on Top Layer "NETFU12_2_L01_P131" (solid, remove dead copper, pour order 131): 5.5,83.5 5.25,83.75 5.25,87 5.5,87.25 11.8,87.25 13.225,85.825 16.9,85.825 17.15,85.575 17.15,82.575 16.9,82.325 12.975,82.325 11.8,83.5
NetFU2_2 on Top Layer "NETFU2_2_L01_P130" (solid, remove dead copper, pour order 130): 40.1,4.875 40.1,7.875 40.1,15.3 40.35,15.55 43.65,15.55 43.9,15.3 43.9,7.875 43.9,4.875 43.65,4.625 40.35,4.625
NetFU4_2 on Top Layer "NETFU4_2_L01_P127" (solid, remove dead copper, pour order 127): 73.6,4.875 73.6,7.875 73.6,15.3 73.85,15.55 77.15,15.55 77.4,15.3 77.4,7.875 77.4,4.875 77.15,4.625 73.85,4.625
NetFU17_2 on Top Layer "NETFU17_2_L01_P126" (solid, remove dead copper, pour order 126): 120.25,66.25 120.5,66 121.7,66 123.55,64.15 123.55,61.725 123.8,61.475 126.8,61.475 127.05,61.725 127.05,69.5 126.8,69.75 120.5,69.75 120.25,69.5
NetFU25_1 on Top Layer "NETFU25_1_L01_P123" (solid, remove dead copper, pour order 123): 120.25,49.75 120.5,49.5 121.7,49.5 123.55,47.65 123.55,45.225 123.8,44.975 126.8,44.975 127.05,45.225 127.05,53 126.8,53.25 120.5,53.25 120.25,53
GND on Top Layer "GND_L01_P122" (solid, remove dead copper, pour order 122): 96.375,29.625 96.375,32.75 96.125,33 85.05,33 84.8,33.25 84.8,37.425 85.05,37.675 91.95,37.675 92.825,38.55 100.65,38.55 101.9,39.8 108.375,39.8 108.625,40.05 108.625,47 108.875,47.25 116.125,47.25 116.375,47 116.375,32.5 116.125,32.25 111,32.25 110.75,32.5 110.75,36.5 110.5,36.75 101.65,36.75 101.4,36.5 101.4,29.625 101.15,29.375 96.625,29.375
+5V on Top Layer "+5V_L01_P121" (solid, remove dead copper, pour order 121): 87.167,38.283 87.425,38.025 91.825,38.025 92.15,38.35 92.15,50.45 91.9,50.7 87.425,50.7 87.167,50.442
NetC76_1 on Top Layer "NETC76_1_L01_P120" (solid, remove dead copper, pour order 120): 93.15,48.55 92.9,48.3 92.9,39.95 93.157,39.693 99.218,39.693 99.475,39.95 99.475,40.675 99.725,40.925 102.275,40.925 102.275,41.8 102.025,42.05 101.05,42.05 100.8,42.3 96.525,42.3 96.275,42.55 96.275,48.3 96.025,48.55
+1.8V on Top Layer "+1.8V_L01_P119" (solid, remove dead copper, pour order 119): 75.375,42.35 82.375,42.35 83.25,43.225 83.25,44.85 83,45.1 81.75,45.1 81.225,44.575 76.875,44.575 76.625,44.825 76.625,46.525 76.425,46.725 75.375,46.725 75.125,46.475 75.125,42.6
+3.3V on Top Layer "+3.3V_L01_P118" (solid, remove dead copper, pour order 118): 75.375,52.975 76.425,52.975 76.625,53.175 76.625,54.875 76.875,55.125 82.925,55.125 83.25,55.45 83.25,56.475 81.375,58.35 75.375,58.35 75.125,58.1 75.125,53.225
+5V on Top Layer "+5V_L01_P116" (solid, remove dead copper, pour order 116): 66.375,51.525 66.125,51.775 66.125,54.35 66.375,54.6 70.15,54.6 70.325,54.425 70.325,52.5 70.475,52.35 72.5,52.35 72.65,52.2 72.65,51.525
+5V on Top Layer "+5V_L01_P115" (solid, remove dead copper, pour order 115): 68.875,44.3 68.625,44.55 68.625,47.925 68.85,48.15 72.65,48.15 72.65,47.5 72.5,47.35 70.475,47.35 70.325,47.2 70.325,44.55 70.075,44.3
GND on Top Layer "GND_L01_P082" (solid, remove dead copper, pour order 82): 70.85,47.15 70.675,46.975 70.675,45.275 70.85,45.1 72.55,45.1 72.725,45.275 72.725,46.975 72.55,47.15
GND on Top Layer "GND_L01_P083" (solid, remove dead copper, pour order 83): 70.85,54.6 70.675,54.425 70.675,52.725 70.85,52.55 72.55,52.55 72.725,52.725 72.725,54.425 72.55,54.6
NetDA11_3 on Top Layer "NETDA11_3_L01_P084" (solid, remove dead copper, pour order 84): 72.95,46.575 74.475,46.575 74.65,46.4 74.65,42.95 74.475,42.775 73.125,42.775 72.95,42.95
NetDA11_10 on Top Layer "NETDA11_10_L01_P085" (solid, remove dead copper, pour order 85): 72.95,53.125 74.475,53.125 74.65,53.3 74.65,56.75 74.475,56.925 73.125,56.925 72.95,56.75
GND on Top Layer "GND_L01_P086" (solid, remove dead copper, pour order 86): 73.55,48.175 74.625,48.175 cw(c74.625,47.875) 74.925,47.875 74.925,47.1 cw(c74.625,47.1) 74.625,46.8 73.85,46.8 cw(c73.85,47.1) 73.55,47.1
GND on Top Layer "GND_L01_P087" (solid, remove dead copper, pour order 87): 73.55,51.525 74.625,51.525 ccw(c74.625,51.825) 74.925,51.825 74.925,52.6 ccw(c74.625,52.6) 74.625,52.9 73.85,52.9 ccw(c73.85,52.6) 73.55,52.6
GND on Top Layer "GND_L01_P090" (solid, remove dead copper, pour order 90): 76.875,52.975 76.625,52.725 75.75,52.725 75.5,52.475 75.5,51.325 75.75,51.075 77.175,51.075 77.375,51.275 77.375,52.1 77.625,52.35 81.2,52.35 81.45,52.6 81.45,54.475 81.2,54.725 77.125,54.725 76.875,54.475
GND on Top Layer "GND_L01_P091" (solid, remove dead copper, pour order 91): 76.875,46.725 76.625,46.975 75.75,46.975 75.5,47.225 75.5,48.375 75.75,48.625 77.175,48.625 77.375,48.425 77.375,47.6 77.625,47.35 81.2,47.35 81.45,47.1 81.45,45.225 81.2,44.975 77.125,44.975 76.875,45.225
GND on Bottom Layer "GND_L04_P146" (solid, remove dead copper, pour order 146): 65.75,48.55 75.2,48.55 75.5,48.25 75.5,44.275 75.8,43.975 80.775,43.975 83.275,46.475 83.275,54.875 82.975,55.175 75.8,55.175 75.5,54.875 75.5,51.45 75.2,51.15 65.75,51.15 65.45,50.85 65.45,48.85
GND on Bottom Layer "GND_L04_P144" (solid, remove dead copper, pour order 144): 44.775,5.55 45.075,5.25 120.175,5.25 120.475,5.55 120.475,24.8 120.175,25.1 116.675,25.1 116.375,25.4 116.375,47.572 115.722,48.225 85.525,48.225 80.95,43.65 45.075,43.65 44.775,43.35
GND_IF on Bottom Layer "GND_IF_L04_P142" (solid, remove dead copper, pour order 142): 23.75,7.9 23.75,20.65 19.9,24.5 17.425,24.5 16.575,25.35 16.575,29.075 16.875,29.375 34.125,29.375 34.425,29.075 34.425,25.35 33.575,24.5 31.1,24.5 27.25,20.65 27.25,5.55 26.95,5.25 24.05,5.25 23.75,5.55
GND on Bottom Layer "GND_L04_P141" (solid, remove dead copper, pour order 141): 111.15,69.575 111.15,49.775 110.85,49.475 87.375,49.475 87.075,49.775 87.075,69.575 87.375,69.875 110.85,69.875
GND on Bottom Layer "GND_L04_P140" (solid, remove dead copper, pour order 140): 18.85,49.15 18.85,68.95 19.15,69.25 42.625,69.25 42.925,68.95 42.925,49.15 42.625,48.85 19.15,48.85
GND on Bottom Layer "GND_L04_P139" (solid, remove dead copper, pour order 139): 117.9,21.625 117.9,15.55 117.65,15.3 114.35,15.3 114.1,15.55 114.1,21.625 114.35,21.875 117.65,21.875
NetVD31_2 on Bottom Layer "NETVD31_2_L04_P135" (solid, remove dead copper, pour order 135): 112.9,21.625 112.9,15.55 112.65,15.3 109.35,15.3 109.1,15.55 109.1,21.625 109.35,21.875 112.65,21.875
NetFU12_2 on Bottom Layer "NETFU12_2_L04_P132" (solid, remove dead copper, pour order 132): 5.475,87.275 11.55,87.275 11.8,87.025 11.8,83.725 11.55,83.475 5.475,83.475 5.225,83.725 5.225,87.025
NetFU2_2 on Bottom Layer "NETFU2_2_L04_P129" (solid, remove dead copper, pour order 129): 40.1,4.875 40.1,10.95 40.35,11.2 43.65,11.2 43.9,10.95 43.9,4.875 43.65,4.625 40.35,4.625
NetFU4_2 on Bottom Layer "NETFU4_2_L04_P128" (solid, remove dead copper, pour order 128): 73.6,4.875 73.6,10.95 73.85,11.2 77.15,11.2 77.4,10.95 77.4,4.875 77.15,4.625 73.85,4.625
NetFU17_2 on Bottom Layer "NETFU17_2_L04_P125" (solid, remove dead copper, pour order 125): 120.25,66.25 120.25,69.5 120.5,69.75 126.8,69.75 127.05,69.5 127.05,66.25 126.8,66 120.5,66
NetFU25_1 on Bottom Layer "NETFU25_1_L04_P124" (solid, remove dead copper, pour order 124): 120.25,49.75 120.25,53 120.5,53.25 126.8,53.25 127.05,53 127.05,49.75 126.8,49.5 120.5,49.5
GND_IF on Ground Plane (split plane): 40.7,37.375 40.7,26.925 35.825,22.05 35.825,0.402 13.325,0.402 13.325,34.175 17.75,38.6 39.475,38.6
GND on Ground Plane (split plane): 129.598,0.402 39.625,0.402 39.625,21.075 44.5,25.95 44.5,39.6 41.7,42.4 15.5,42.4 9.525,36.425 9.525,0.402 0.402,0.402 0.402,99.598 129.598,99.598
GND on Ground Plane (split plane): 74.898,46.967 73.083,45.152 72.027,45.152 72.027,47.098 73.4,47.098 73.439,47.106 73.472,47.128 74.444,48.1 74.898,48.1
GND on Ground Plane (split plane): 74.898,52.733 74.898,51.6 74.444,51.6 73.472,52.572 73.439,52.594 73.4,52.602 72.027,52.602 72.027,54.548 73.083,54.548
+5V on Power Plane (split plane): 48.348,94.997 40.875,94.997 40.829,94.99 40.787,94.973 40.75,94.945 40.722,94.908 40.705,94.866 40.698,94.82 40.698,90.827 17.675,90.827 17.626,90.818 17.585,90.79 17.557,90.749 17.548,90.7 17.548,87.002 14.375,87.002 14.326,86.993 14.285,86.965 14.257,86.924 14.248,86.875 14.248,75.175 14.257,75.126 14.285,75.085 14.326,75.057 14.375,75.048 42.7,75.048 43.198,75.048 43.198,59.052 26.825,59.052 26.776,59.043 26.735,59.015 26.707,58.974 26.698,58.925 26.698,47.1 26.707,47.051 26.735,47.01 26.776,46.982 26.825,46.973 35.075,46.973 35.124,46.982 35.165,47.01 35.193,47.051 35.202,47.1 35.202,53.423 45.548,53.423 45.548,44.225 45.557,44.176 45.585,44.135 45.626,44.107 45.675,44.098 57.9,44.098 65.45,44.098 65.499,44.107 65.54,44.135 65.568,44.176 65.577,44.225 65.577,55.123 71.173,55.123 71.173,48.4 71.182,48.351 71.21,48.31 71.251,48.282 71.3,48.273 85.025,48.273 85.074,48.282 85.115,48.31 85.143,48.351 85.152,48.4 85.152,75.048 114.65,75.048 114.699,75.057 114.74,75.085 114.768,75.126 114.777,75.175 114.777,90.7 114.768,90.749 114.74,90.79 114.699,90.818 114.65,90.827 112.127,90.827 112.127,97.123 120.423,97.123 120.423,58.927 116.375,58.927 116.329,58.92 116.287,58.903 116.25,58.875 116.222,58.838 116.205,58.796 116.198,58.75 116.198,34.627 95.65,34.627 95.604,34.62 95.562,34.603 95.525,34.575 95.497,34.538 95.48,34.496 95.473,34.45 95.473,0.402 39.625,0.402 39.625,21.075 44.5,25.95 44.5,39.6 41.7,42.4 15.5,42.4 9.525,36.425 9.525,0.402 0.402,0.402 0.402,99.598 48.348,99.598
+VISO on Power Plane (split plane): 40.7,37.375 40.7,26.925 35.825,22.05 35.825,0.402 13.325,0.402 13.325,34.175 17.75,38.6 39.475,38.6
+3.3V on Power Plane (split plane): 114.523,75.302 85.025,75.302 84.976,75.293 84.935,75.265 84.907,75.224 84.898,75.175 84.898,48.527 71.427,48.527 71.427,55.25 71.418,55.299 71.39,55.34 71.349,55.368 71.3,55.377 65.45,55.377 65.401,55.368 65.36,55.34 65.332,55.299 65.323,55.25 65.323,44.352 57.9,44.352 45.802,44.352 45.802,53.55 45.793,53.599 45.765,53.64 45.724,53.668 45.675,53.677 35.075,53.677 35.026,53.668 34.985,53.64 34.957,53.599 34.948,53.55 34.948,47.227 26.952,47.227 26.952,58.798 43.325,58.798 43.374,58.807 43.415,58.835 43.443,58.876 43.452,58.925 43.452,75.175 43.443,75.224 43.415,75.265 43.374,75.293 43.325,75.302 42.7,75.302 14.502,75.302 14.502,86.748 17.675,86.748 17.724,86.757 17.765,86.785 17.793,86.826 17.802,86.875 17.802,90.573 40.754,90.573 40.787,90.547 40.829,90.53 40.875,90.523 111.95,90.523 111.996,90.53 112.038,90.547 112.071,90.573 114.523,90.573
+5V_REFA on Power Plane (split plane): 32.623,72.452 28.8,72.452 28.751,72.443 28.71,72.415 28.682,72.374 28.673,72.325 28.673,69.952 24.802,69.952 24.802,71.073 27.5,71.073 27.549,71.082 27.59,71.11 27.618,71.151 27.627,71.2 27.627,73.573 32.623,73.573
+24V on Power Plane (split plane): 129.598,0.402 95.827,0.402 95.827,34.273 116.375,34.273 116.421,34.28 116.463,34.297 116.5,34.325 116.528,34.362 116.545,34.404 116.552,34.45 116.552,58.573 120.6,58.573 120.646,58.58 120.688,58.597 120.725,58.625 120.753,58.662 120.77,58.704 120.777,58.75 120.777,97.3 120.77,97.346 120.753,97.388 120.725,97.425 120.688,97.453 120.646,97.47 120.6,97.477 111.95,97.477 111.904,97.47 111.862,97.453 111.825,97.425 111.797,97.388 111.78,97.346 111.773,97.3 111.773,90.877 41.052,90.877 41.052,94.643 48.525,94.643 48.571,94.65 48.613,94.667 48.65,94.695 48.678,94.732 48.695,94.774 48.702,94.82 48.702,99.598 129.598,99.598
NetC5_2 on Power Plane (split plane): 59.823,83.3 59.832,83.251 59.86,83.21 59.901,83.182 59.95,83.173 79.723,83.173 79.723,81.227 58.652,81.227 58.652,86.673 59.823,86.673
+5V_REFB on Power Plane (split plane): 98.623,72.452 94.8,72.452 94.751,72.443 94.71,72.415 94.682,72.374 94.673,72.325 94.673,69.952 90.802,69.952 90.802,71.073 93.5,71.073 93.549,71.082 93.59,71.11 93.618,71.151 93.627,71.2 93.627,73.573 98.623,73.573

## Keep-outs
Keep-Out Layer:
  the board outline again, w0.254

## Other copper
Top Layer:
  region net GND_IF: 20.125,24.5 17.425,24.5 17.175,24.75 17.175,27.75 17.425,28 20.125,28 20.375,27.75 20.375,24.75
  region net NetC70_1: 37.725,39.375 37.725,42.425 37.975,42.675 40.375,42.675 40.625,42.425 40.625,39.375 40.375,39.125 37.975,39.125
  region net GND: 40.625,47.475 40.625,45.425 40.375,45.175 37.975,45.175 37.725,45.425 37.725,47.475 37.975,47.725 40.375,47.725
  region net GND_IF: 37.725,34.325 37.725,36.375 37.975,36.625 40.375,36.625 40.625,36.375 40.625,34.325 40.375,34.075 37.975,34.075
  region net GND: 96.375,22.775 96.375,25.7 96.6,25.925 98.25,25.925 98.5,25.675 98.5,22.8 98.25,22.55 96.6,22.55
  region net +5V: 17.15,91.175 16.9,91.425 13.6,91.425 13.35,91.175 13.35,88.175 13.6,87.925 16.9,87.925 17.15,88.175
  region net +5V: 77.4,20.9 77.15,21.15 73.85,21.15 73.6,20.9 73.6,17.9 73.85,17.65 77.15,17.65 77.4,17.9
  region net +5V: 43.9,20.9 43.65,21.15 40.35,21.15 40.1,20.9 40.1,17.9 40.35,17.65 43.65,17.65 43.9,17.9
  region net +24V_FUSE: 118.2,48.775 117.95,48.525 117.95,43.875 118.2,43.625 121.2,43.625 121.45,43.875 121.45,48.525 121.2,48.775
  region net +5V: 118.2,65.275 117.95,65.025 117.95,61.725 118.2,61.475 121.2,61.475 121.45,61.725 121.45,65.025 121.2,65.275
  region net GND_IF: 33.575,24.5 30.875,24.5 30.625,24.75 30.625,27.75 30.875,28 33.575,28 33.825,27.75 33.825,24.75
  region net GND_IF: 26.45,27 29.15,27 29.4,26.75 29.4,23.75 29.15,23.5 26.45,23.5 26.2,23.75 26.2,26.75
  region net GND_IF: 21.85,27 24.55,27 24.8,26.75 24.8,23.75 24.55,23.5 21.85,23.5 21.6,23.75 21.6,26.75
  region net GND: 49.65,27 52.35,27 52.6,26.75 52.6,23.75 52.35,23.5 49.65,23.5 49.4,23.75 49.4,26.75
  region net GND: 45.05,27 47.75,27 48,26.75 48,23.75 47.75,23.5 45.05,23.5 44.8,23.75 44.8,26.75
  region net GND: 67.9,15.355 70.6,15.355 70.85,15.105 70.85,12.105 70.6,11.855 67.9,11.855 67.65,12.105 67.65,15.105
  region net GND: 63.3,15.355 66,15.355 66.25,15.105 66.25,12.105 66,11.855 63.3,11.855 63.05,12.105 63.05,15.105
  region net GND: 92.35,27 95.05,27 95.3,26.75 95.3,23.75 95.05,23.5 92.35,23.5 92.1,23.75 92.1,26.75
  region net GND: 87.75,27 90.45,27 90.7,26.75 90.7,23.75 90.45,23.5 87.75,23.5 87.5,23.75 87.5,26.75
  region net GND: 83.15,27 85.85,27 86.1,26.75 86.1,23.75 85.85,23.5 83.15,23.5 82.9,23.75 82.9,26.75
  region net GND: 78.55,27 81.25,27 81.5,26.75 81.5,23.75 81.25,23.5 78.55,23.5 78.3,23.75 78.3,26.75
  region net GND: 109.625,53.2 109.625,50.5 109.375,50.25 106.375,50.25 106.125,50.5 106.125,53.2 106.375,53.45 109.375,53.45
  region net GND: 109.625,57.8 109.625,55.1 109.375,54.85 106.375,54.85 106.125,55.1 106.125,57.8 106.375,58.05 109.375,58.05
  region net GND: 109.625,62.4 109.625,59.7 109.375,59.45 106.375,59.45 106.125,59.7 106.125,62.4 106.375,62.65 109.375,62.65
  region net GND: 109.625,67 109.625,64.3 109.375,64.05 106.375,64.05 106.125,64.3 106.125,67 106.375,67.25 109.375,67.25
  region net GND: 20.375,64.3 20.375,67 20.625,67.25 23.625,67.25 23.875,67 23.875,64.3 23.625,64.05 20.625,64.05
  region net GND: 20.375,59.7 20.375,62.4 20.625,62.65 23.625,62.65 23.875,62.4 23.875,59.7 23.625,59.45 20.625,59.45
  region net GND: 20.375,55.1 20.375,57.8 20.625,58.05 23.625,58.05 23.875,57.8 23.875,55.1 23.625,54.85 20.625,54.85
  region net GND: 20.375,50.5 20.375,53.2 20.625,53.45 23.625,53.45 23.875,53.2 23.875,50.5 23.625,50.25 20.625,50.25
Bottom Layer:
  region net GND: 102.25,39.375 102.25,37.175 105.25,37.175 105.25,39.375
  region net GND: 71.65,50.975 71.65,48.725 73.9,48.725 73.9,50.975
  rectangle net GND: 24.65,79.95 32.95,83.85
  rectangle net GND: 90.65,79.95 98.95,83.85
  pour cut-out: 60,19.8 cw(c60,24.8) 60,29.8 70,29.8 cw(c70,24.8) 70,19.8
  pour cut-out: 80.1,41.625 80.1,43.075 80.075,43.075 80.075,41.625
  pour cut-out: 99.825,39.975 99.575,39.725 99.575,35.05 99.825,34.8 106.075,34.8 106.325,35.05 106.325,39.725 106.075,39.975
Ground Plane (plane layer: these items are gaps in the copper):
  pour cut-out: 9.525,0 13.325,0 13.325,34.175 17.75,38.6 39.475,38.6 40.7,37.375 40.7,26.925 35.825,22.05 35.825,0 39.625,0 39.625,21.075 44.5,25.95 44.5,39.6 41.7,42.4 15.5,42.4 9.525,36.425
  lines w0.2: 71.925,52.5 73.4,52.5 ; 71.925,52.5 71.925,54.65 ; 71.925,52.5 73.4,52.5 ; 71.925,52.5 71.925,54.65 ; 71.925,54.65 73.125,54.65 ; 71.925,54.65 73.125,54.65 ; 73.125,54.65 75,52.775 ; 73.125,54.65 75,52.775 ; 73.4,52.5 74.402,51.498 ; 73.4,52.5 74.402,51.498 ; 74.402,51.498 75,51.498 ; 74.402,51.498 75,51.498 ; 75,51.498 75,52.775 ; 75,51.498 75,52.775 ; 71.925,45.05 71.925,47.2 73.4,47.2 74.402,48.202 75,48.202 75,46.925 73.125,45.05 71.925,45.05
Power Plane (plane layer: these items are gaps in the copper):
  pour cut-out: 9.525,0 13.325,0 13.325,34.175 17.75,38.6 39.475,38.6 40.7,37.375 40.7,26.925 35.825,22.05 35.825,0 39.625,0 39.625,21.075 44.5,25.95 44.5,39.6 41.7,42.4 15.5,42.4 9.525,36.425
  lines w0.25: 40.875,90.7 17.675,90.7 17.675,86.875 14.375,86.875 14.375,75.175 42.7,75.175 43.325,75.175 43.325,58.925 26.825,58.925 26.825,47.1 35.075,47.1 35.075,53.55 45.675,53.55 45.675,44.225 57.9,44.225 65.45,44.225 65.45,55.25 71.3,55.25 71.3,48.4 85.025,48.4 85.025,75.175 114.65,75.175 114.65,90.7 111.95,90.7 ; 59.95,86.8 58.525,86.8 58.525,81.1 79.85,81.1 79.85,83.3 59.95,83.3 59.95,86.8 ; 59.95,86.8 59.95,86.8 ; 24.675,69.825 24.675,71.2 27.5,71.2 27.5,73.7 32.75,73.7 32.75,72.325 28.8,72.325 28.8,69.825 24.675,69.825 ; 90.675,69.825 90.675,71.2 93.5,71.2 93.5,73.7 98.75,73.7 98.75,72.325 94.8,72.325 94.8,69.825 90.675,69.825
  lines w0.35: 48.525,99.975 48.525,94.82 40.875,94.82 40.875,90.7 111.95,90.7 111.95,97.3 120.6,97.3 120.6,58.75 116.375,58.75 116.375,34.45 95.65,34.45 95.65,-0.05

## Silkscreen, mask and mechanical layers (free items; w line width, h text height)
Top Overlay:
  lines w0.15: 11.625,21.55 11.975,21.55 ; 11.975,21.2 11.975,21.55 ; 13.675,73.7 13.675,72.325 21.475,72.325 23.65,74.5 ; 21.575,49.225 21.85,49.225 ; 21.85,48.95 21.85,49.225 ; 23.225,74.5 23.65,74.5 ; 23.65,74.075 23.65,74.5 ; 24.05,46.875 24.25,47.075 ; 24.05,47.275 24.25,47.075 ; 48.425,65.625 47.55,65.625 47.55,69.375 49.175,69.375 49.175,69.95 ; 48.963,69.738 49.175,69.95 ; 49.387,69.738 49.175,69.95 ; 58.825,54.825 58.825,54.05 65.55,54.05 67.05,55.55 ; 66.225,51.875 66.9,51.875 ; 66.725,51.7 66.9,51.875 ; 66.725,52.05 66.9,51.875 ; 66.75,55.55 67.05,55.55 ; 67.05,55.25 67.05,55.55 ; 73.25,27.65 73.25,26.775 77.4,26.775 ; 75.625,33.525 75.775,33.675 ; 75.925,33.525 75.775,33.675 ; 77.15,26.525 77.4,26.775 ; 77.15,27.025 77.4,26.775 ; 78.4,31.425 78.4,30.925 75.775,30.925 75.775,33.675 ; 78.8,47.225 84.65,47.225 84.65,52.35 85.45,52.35 ; 79.525,75 79.525,74.25 79.9,74.25 ; 80.4,52.6 80.4,52.875 ; 80.675,52.875 80.4,52.875 ; 81.125,44.85 80.95,45.025 ; 81.125,45.2 80.95,45.025 ; 81.325,45.025 80.95,45.025 ; 81.5,70.75 81.5,69.825 88.65,69.825 89.1,70.275 ; 82.425,73.8 86.875,73.8 87.325,74.25 ; 83.825,52.875 83.825,52.5 80.775,52.5 80.4,52.875 ; 86.775,67 86.775,66.75 ; 87.025,66.75 86.775,66.75 ; 87.075,74.25 87.325,74.25 ; 87.325,74 87.325,74.25 ; 88.15,68.4 87.15,68.4 87.15,67.125 86.775,66.75 ; 88.85,70.275 89.1,70.275 ; 89.1,70.025 89.1,70.275 ; 97.95,57.6 98.175,57.6 98.175,58.675 ; 97.95,59.85 98.175,59.85 98.175,58.675 ; 102.875,59.075 103.1,59.075 ; 103.1,58.85 103.1,59.075 ; 105.525,81.325 105.7,81.5 ; 105.7,81.025 105.7,81.5 ; 105.875,81.325 105.7,81.5 ; 108.425,49.325 108.625,49.525 ; 108.825,49.325 108.625,49.525 ; 110.75,48.2 108.625,48.2 108.625,49.525 ; 111.45,81.3 111.825,81.3 111.825,77.85 ; 111.625,78.05 111.825,77.85 ; 112.025,78.05 111.825,77.85 ; 117.175,75.65 117.175,75.275 ; 117.55,75.275 117.175,75.275 ; 117.575,82.525 117.95,82.525 117.95,76.05 117.175,75.275 ; 11.075,20.65 11.975,21.55 ; 11.075,20.65 6.5,20.65 6.5,13.575 11.075,13.575 11.075,20.65 ; 18.05,48.725 21.35,48.725 21.85,49.225 ; 18.05,48.725 13.25,48.725 13.25,42.825 18.05,42.825 18.05,48.725 ; 23.45,47.075 24.25,47.075 ; 23.45,47.075 20.425,47.075 20.425,44.3 23.45,44.3 23.45,47.075 ; 80.95,45.025 80.95,45.025 ; 80.95,45.025 80.95,45.025 ; 98.175,58.675 102.7,58.675 103.1,59.075
Mechanical 1:
  lines w0.05: 60,19.8 cw(c60,24.8) 60,29.8 ; 70,19.8 ccw(c70,24.8) 70,29.8 ; 9.525,0 13.325,0 13.325,34.175 17.75,38.6 39.475,38.6 40.7,37.375 40.7,26.925 35.825,22.05 35.825,0 39.625,0 39.625,21.075 44.5,25.95 44.5,39.6 41.7,42.4 15.5,42.4 9.525,36.425 9.525,0 ; 37.725,34.325 37.975,34.075 40.375,34.075 40.625,34.325 40.625,36.375 40.375,36.625 37.975,36.625 37.725,36.375 37.725,34.325 ; 37.725,39.375 37.725,42.425 37.975,42.675 40.375,42.675 40.625,42.425 40.625,39.375 40.375,39.125 37.975,39.125 37.725,39.375
  lines w0.15: 60,19.8 70,19.8 ; 60,29.8 70,29.8 ; 16.575,25.35 16.575,29.075 16.875,29.375 34.125,29.375 34.425,29.075 34.425,25.35 33.575,24.5 31.1,24.5 27.25,20.65 27.25,7.9 27.25,5.55 26.95,5.25 24.05,5.25 23.75,5.55 23.75,7.9 23.75,20.65 19.9,24.5 17.425,24.5 16.575,25.35 ; 18.85,49.15 18.85,68.95 19.15,69.25 42.625,69.25 42.925,68.95 42.925,49.15 42.625,48.85 19.15,48.85 18.85,49.15 ; 44.775,5.55 44.775,43.35 45.075,43.65 80.95,43.65 85.525,48.225 115.722,48.225 116.375,47.572 116.375,25.4 116.675,25.1 120.175,25.1 120.475,24.8 120.475,5.55 120.175,5.25 71.875,5.25 45.075,5.25 44.775,5.55 ; 65.45,48.85 65.45,50.85 65.75,51.15 75.2,51.15 75.5,51.45 75.5,52.375 75.5,54.875 75.8,55.175 82.975,55.175 83.275,54.875 83.275,46.475 80.775,43.975 75.8,43.975 75.5,44.275 75.5,48.25 75.2,48.55 65.75,48.55 65.45,48.85
Board Layout:
  the board outline again, w0.15
Top AuxMech:
  drawing of 168 lines, arcs and shapes, not listed
Bottom AuxMech:
  lines w0.05: 73.6,4.875 73.6,10.95 73.85,11.2 77.15,11.2 77.4,10.95 77.4,4.875 77.15,4.625 73.85,4.625 73.6,4.875